# EAGLE board 190_Final.g (EAGLE 7.0.0)

Size 160 x 100 mm. Coordinates in mm from the lower left corner, seen from the top.
Outline: 0,0 0,100 160,100 160,0 0,0
Copper layers (1*16): Top 0.035mm / dielectric 1.5mm / Bottom 0.035mm
Design rules "default": minimum track width 10mil, minimum drill 0.6mm, track to track 8mil, track to pad 8mil, pad to pad 8mil, via to via 8mil, smd to smd 8mil, copper to edge 40mil, drill to drill 8mil, minimum pad ring 10mil, minimum via ring 8mil, stop-mask expansion 4mil, vias tented up to drill 0mil, thermal gap 10mil

## Footprints (pad centres in the part's own frame; a part is rotated, then mirrored left to right if it is on the bottom)
BUTTON-TACTILE-ROUND-ADAFRUIT1009 = drill 1.5 square: P -6,2.5 | drill 1.5: P2 6,2.5; S -6,-2.5; S2 6,-2.5 | hole 2: 0,-4.5; 0,4.5
BATTERY_9V_KEYSTONE_968 = drill 2.2: N 6.35,0 | drill 2.2 octagon: P -6.35,0
ANALOG_DISTANCE_SENSOR_GLUE_MOUNT = drill 0.9: GND -2.54,0.508; VCC -2.54,-2.032; VO -2.54,3.048
SPARKFUN_DUAL_MOTOR_DRIVER = drill 1.016 pad 1.88 long: A01 7.62,1.27; A02 7.62,-1.27; AIN1 -7.62,3.81; AIN2 -7.62,6.35; B01 7.62,-6.35; B02 7.62,-3.81; BIN1 -7.62,-1.27; BIN2 -7.62,-3.81; GND -7.62,-8.89; GND1 7.62,3.81; GND2 7.62,-8.89; PWMA -7.62,8.89; PWMB -7.62,-6.35; STBY -7.62,1.27; VCC 7.62,6.35; VM 7.62,8.89
SOLARBOTICS_G2_LEFT = drill 1.27 long: + -40.545,-3.68; - -43.45,-3.68 | hole 3: -25.1,-10.2; -25.1,3.6
LED5MM = drill 0.9 pad 1.676 square: A -1.27,0 | drill 0.9 pad 1.676: K 1.27,0
SOLARBOTICS_G2 = drill 1.27 long: + 40.545,-3.68; - 42.815,-3.68 | hole 3: 25.1,-10.2; 25.1,3.6
ADAFRUIT-PRO-TRINKET-5V = drill 1.016 pad 1.778: +5V 7.62,24.13; A0 -7.62,16.51; A1 -7.62,13.97; A2 -7.62,11.43; A3 -7.62,8.89; A4 -7.62,6.35; A5 -7.62,3.81; AREF -7.62,19.05; D3 7.62,11.43; D4 7.62,13.97; D5 7.62,16.51; D6 7.62,19.05; D8 7.62,21.59; D9 -7.62,31.75; D10 -7.62,29.21; D11 -7.62,26.67; D12 -7.62,24.13; D13 -7.62,21.59; GND2 7.62,29.21; RESET 7.62,3.81; RXD1 7.62,6.35; TXD1 7.62,8.89; VBAT 7.62,31.75; VBUS1 7.62,26.67 | drill 1 pad 1.778: A6 -5.08,16.51; A7 -5.08,13.97 | drill 1.016 pad 1.778 octagon: DTR/RTS 6.35,1.27; GND -6.35,1.27; GND1 -3.81,1.27; RXD 1.27,1.27; TXD 3.81,1.27; VBUS -1.27,1.27
ADAFRUIT-3/4IN-CASTER = hole 2: -7.62,0; 7.62,0

## Placement (x,y rotation side)
B1_10_button  BUTTON-TACTILE-ROUND  [BUTTON-TACTILE-ROUND-ADAFRUIT1009]  60,12.83 0 top
BATT1_1_battery  BATTERY-9V-VERTICAL  [BATTERY_9V_KEYSTONE_968]  146,10 0 top
D1_3_distanceSensor  ANALOG_DISTANCE_SENSOR-GLUE  [ANALOG_DISTANCE_SENSOR_GLUE_MOUNT]  13.48,71.39 90 top
D1_4_distanceSensor_2  ANALOG_DISTANCE_SENSOR-GLUE  [ANALOG_DISTANCE_SENSOR_GLUE_MOUNT]  13.48,5.39 90 top
D1_5_distanceSensor_3  ANALOG_DISTANCE_SENSOR-GLUE  [ANALOG_DISTANCE_SENSOR_GLUE_MOUNT]  13.48,39.39 90 top
DRVR_2_drive  SPARKFUN_DUAL_MOTOR_DRIVER-BOB  [SPARKFUN_DUAL_MOTOR_DRIVER]  139,85 0 top
L_2_drive  SOLARBOTICS_GM2_LEFT  [SOLARBOTICS_G2_LEFT]  79.41,120.71 90 top
LED1_8_led  [LED5MM]  34.58,12 0 top
LED1_9_led_2  [LED5MM]  46.58,12 0 top
R_2_drive  SOLARBOTICS_GM2  [SOLARBOTICS_G2]  79.49,-20.86 90 top
U1_0_brain  ADAFRUIT-PRO-TRINKET-5V-BOB  [ADAFRUIT-PRO-TRINKET-5V]  60.64,85 90 top
u1_6_caster  CASTERADAFRUIT-3/4IN  [ADAFRUIT-3/4IN-CASTER]  21,50 90 top
u1_7_caster_2  CASTERADAFRUIT-3/4IN  [ADAFRUIT-3/4IN-CASTER]  139,50 90 top

## Library data of the parts
B1_10_button = Components; DIST: Adafruit; DISTPN: 1009; HIERARCHY_NAME: button.B1
BATT1_1_battery = Components; HIERARCHY_NAME: battery.BATT1
D1_3_distanceSensor = Components; DIST: Pololu; DISTPN: 2450; HIERARCHY_NAME: distanceSensor.D1
D1_4_distanceSensor_2 = Components; DIST: Pololu; DISTPN: 2450; HIERARCHY_NAME: distanceSensor_2.D1
D1_5_distanceSensor_3 = Components; DIST: Pololu; DISTPN: 2450; HIERARCHY_NAME: distanceSensor_3.D1
DRVR_2_drive = BOBs; DIST: Sparkfun; DISTPN: 9457; HIERARCHY_NAME: drive.DRVR
L_2_drive = Components; DIST: Solarbotics; DISTPN: gm2; HIERARCHY_NAME: drive.L
LED1_8_led = Components; DIST: Adafruit; DISTPN: 298; HIERARCHY_NAME: led.LED1
LED1_9_led_2 = Components; DIST: Adafruit; DISTPN: 298; HIERARCHY_NAME: led_2.LED1
R_2_drive = Components; DIST: Solarbotics; DISTPN: gm2; HIERARCHY_NAME: drive.R
U1_0_brain = BOBs; DIST: Adafruit; DISTPN: 2000; HIERARCHY_NAME: brain.U1
u1_6_caster = Components; DIST: Adafruit; DISTPN: 1200; HIERARCHY_NAME: caster.u1
u1_7_caster_2 = Components; DIST: Adafruit; DISTPN: 1200; HIERARCHY_NAME: caster_2.u1

## Nets
+5V_0_brain: D1_3_distanceSensor.VCC D1_4_distanceSensor_2.VCC D1_5_distanceSensor_3.VCC DRVR_2_drive.VCC U1_0_brain.+5V
A0_0_brain: D1_3_distanceSensor.VO U1_0_brain.A0
A1_0_brain: D1_4_distanceSensor_2.VO U1_0_brain.A1
A01_2_drive: DRVR_2_drive.A01 R_2_drive.+
A2_0_brain: D1_5_distanceSensor_3.VO U1_0_brain.A2
A02_2_drive: DRVR_2_drive.A02 R_2_drive.-
A3_0_brain: U1_0_brain.A3
A4_0_brain: U1_0_brain.A4
A5_0_brain: U1_0_brain.A5
A6_0_brain: U1_0_brain.A6
A7_0_brain: U1_0_brain.A7
AREF_0_brain: U1_0_brain.AREF
B01_2_drive: DRVR_2_drive.B01 L_2_drive.+
B02_2_drive: DRVR_2_drive.B02 L_2_drive.-
D3_0_brain: DRVR_2_drive.PWMA U1_0_brain.D3
D4_0_brain: DRVR_2_drive.STBY U1_0_brain.D4
D5_0_brain: DRVR_2_drive.PWMB U1_0_brain.D5
D6_0_brain: DRVR_2_drive.AIN1 U1_0_brain.D6
D8_0_brain: DRVR_2_drive.AIN2 U1_0_brain.D8
D9_0_brain: DRVR_2_drive.BIN1 U1_0_brain.D9
D10_0_brain: DRVR_2_drive.BIN2 U1_0_brain.D10
D11_0_brain: LED1_8_led.A U1_0_brain.D11
D12_0_brain: LED1_9_led_2.A U1_0_brain.D12
D13_0_brain: B1_10_button.P U1_0_brain.D13
DTR/RTS_0_brain: U1_0_brain.DTR/RTS
GND_0_brain: B1_10_button.S BATT1_1_battery.N D1_3_distanceSensor.GND D1_4_distanceSensor_2.GND D1_5_distanceSensor_3.GND DRVR_2_drive.GND DRVR_2_drive.GND1 DRVR_2_drive.GND2 U1_0_brain.GND U1_0_brain.GND1 U1_0_brain.GND2
N$1_1_battery: BATT1_1_battery.P
N$1_8_led: LED1_8_led.K
N$1_9_led_2: LED1_9_led_2.K
POS_1_battery: DRVR_2_drive.VM U1_0_brain.VBAT
RESET_0_brain: U1_0_brain.RESET
RXD1_0_brain: U1_0_brain.RXD1
RXD_0_brain: U1_0_brain.RXD
TXD1_0_brain: U1_0_brain.TXD1
TXD_0_brain: U1_0_brain.TXD
VBUS1_0_brain: U1_0_brain.VBUS1
VBUS_0_brain: U1_0_brain.VBUS